# EAGLE board Circuit v1 (EAGLE 5.11)
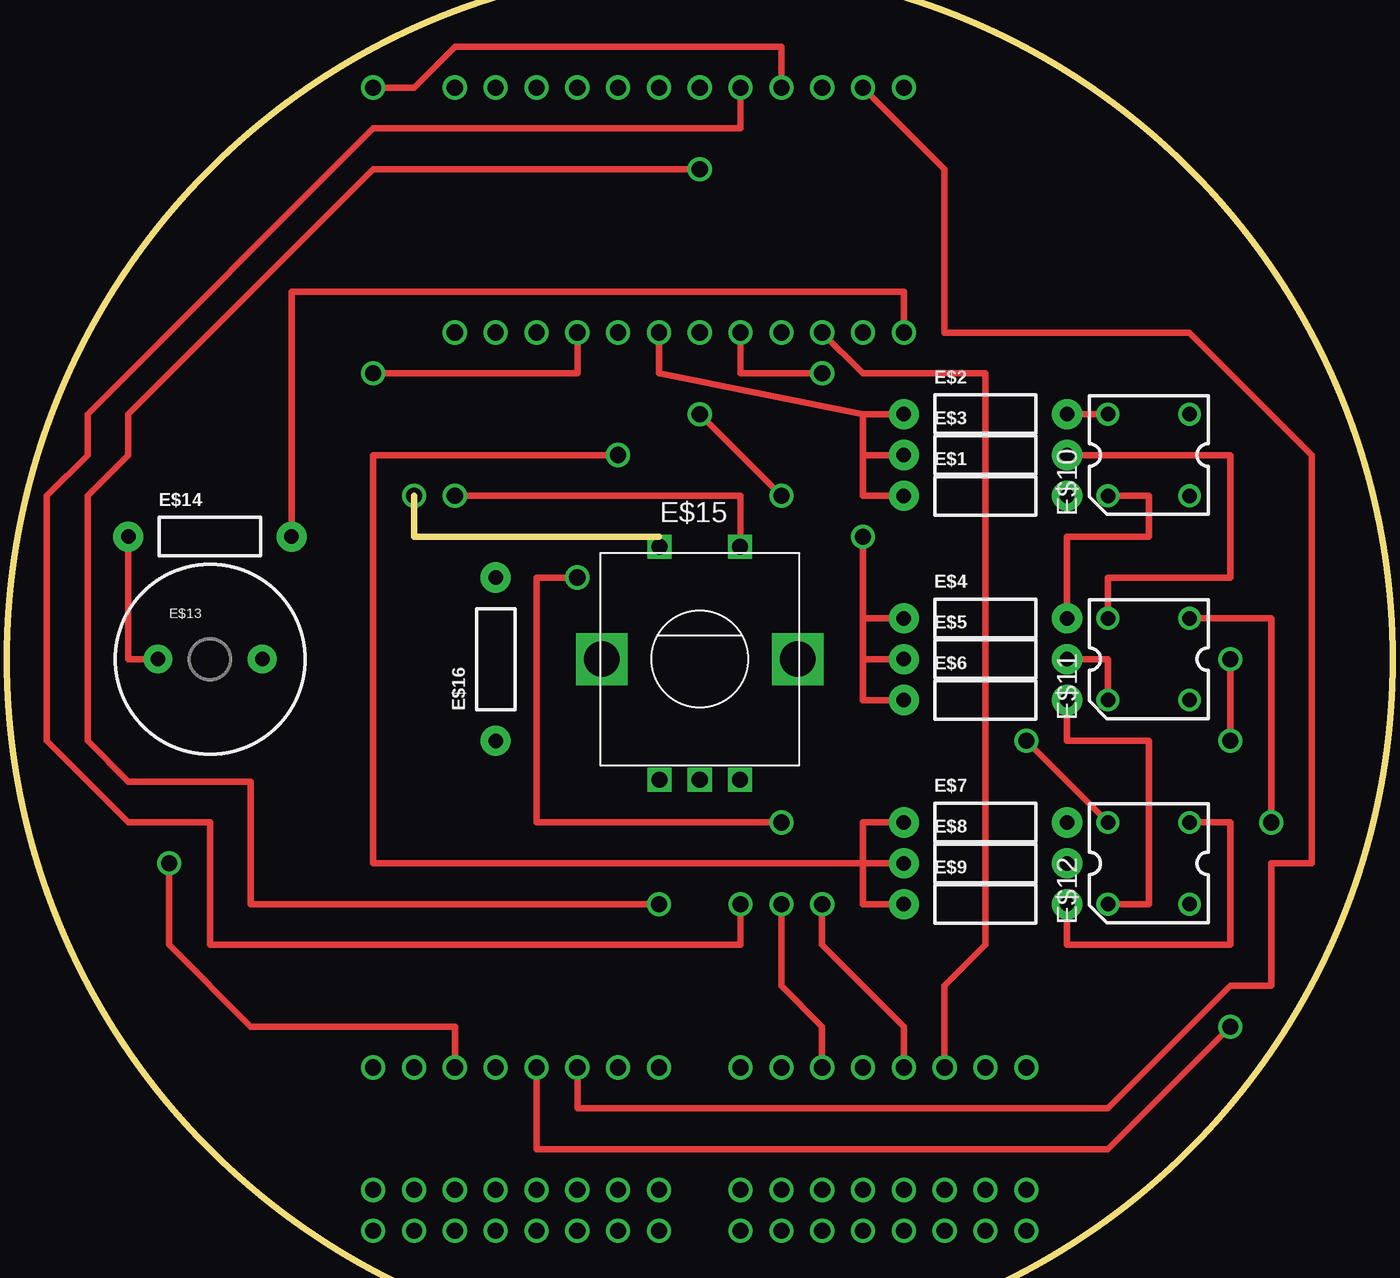
[diagram p0: board, top side]
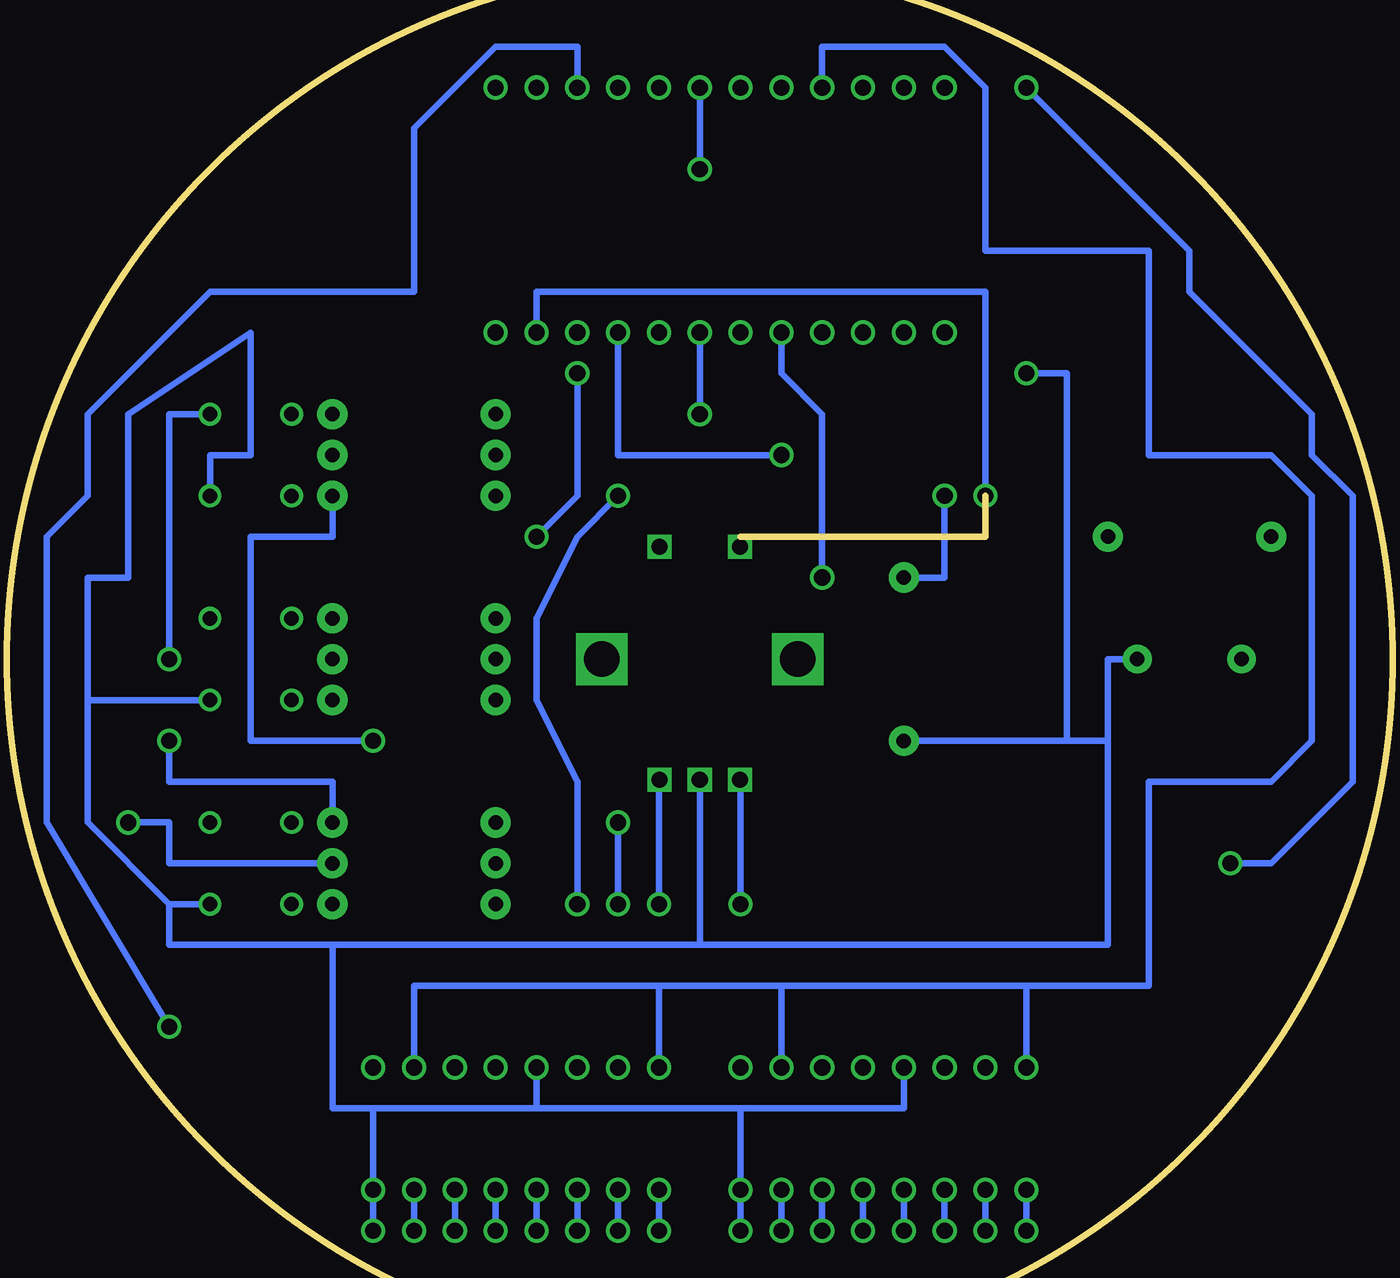
[diagram p1: board, bottom side, seen from below]

Size 15.24 x 2.54 mm. Coordinates in mm from the lower left corner, seen from the top.
Outline: 15.24,0 0,0 0,2.54
Copper layers (1*16): Top 0.035mm / dielectric 1.5mm / Bottom 0.035mm
Design rules "default": minimum track width 10mil, minimum drill 24mil, track to track 8mil, track to pad 8mil, pad to pad 8mil, via to via 8mil, smd to smd 8mil, copper to edge 40mil, drill to drill 8mil, minimum pad ring 10mil, minimum via ring 8mil, stop-mask expansion 4mil, vias tented up to drill 0mil, thermal gap 10mil
Milling: area -25.3,-50.7 to 60.9,35.5

## Footprints (pad centres in the part's own frame; a part is rotated, then mirrored left to right if it is on the bottom)
AXIAL-0.4 = drill 0.9 pad 1.88 round: P$1 -5.08,0; P$2 5.08,0
SUPERFLUX-7.6X7.6 = drill 0.9 pad 1.422 round: 1 -2.54,2.54; 2 2.54,2.54; 3 -2.54,-2.54; 4 2.54,-2.54
BUZZER-12MM = drill 0.9 pad 1.778 round: + 3.25,0; - -3.25,0
ALPS_EC12E_SW = drill 1 square: A -2.5,-7.5; B 2.5,-7.5; C 0,-7.5; D -2.5,7; E 2.5,7 | drill 2.2 square: GND1 -6.1,0; GND2 6.1,0

## Placement (x,y rotation side)
E$1  [AXIAL-0.4]  35.56,2.54 0 top  (outside the outline)
E$2  [AXIAL-0.4]  35.56,7.62 0 top  (outside the outline)
E$3  [AXIAL-0.4]  35.56,5.08 0 top  (outside the outline)
E$4  [AXIAL-0.4]  35.56,-5.08 0 top  (outside the outline)
E$5  [AXIAL-0.4]  35.56,-7.62 0 top  (outside the outline)
E$6  [AXIAL-0.4]  35.56,-10.16 0 top  (outside the outline)
E$7  [AXIAL-0.4]  35.56,-17.78 0 top  (outside the outline)
E$8  [AXIAL-0.4]  35.56,-20.32 0 top  (outside the outline)
E$9  [AXIAL-0.4]  35.56,-22.86 0 top  (outside the outline)
E$10  [SUPERFLUX-7.6X7.6]  45.72,5.08 0 top  (outside the outline)
E$11  [SUPERFLUX-7.6X7.6]  45.72,-7.62 0 top  (outside the outline)
E$12  [SUPERFLUX-7.6X7.6]  45.72,-20.32 0 top  (outside the outline)
E$13  [BUZZER-12MM]  -12.7,-7.62 0 top  (outside the outline)
E$14  [AXIAL-0.4]  -12.7,0 0 top  (outside the outline)
E$15  [ALPS_EC12E_SW]  17.78,-7.62 0 top
E$16  [AXIAL-0.4]  5.08,-7.62 90 top

## Library data of the parts
E$1-E$9 E$13 E$14 E$16 = SparkFun
E$10-E$12 = led
E$15 = switch-alps

## Nets
S$2: E$4.P$2 E$10.3
S$3: E$5.P$2 E$11.3
S$4: E$6.P$2 E$12.3
S$5: E$2.P$2 E$10.1
S$6: E$14.P$2
S$9: E$4.P$1 E$6.P$1
S$11: E$16.P$2
S$12: E$14.P$1
S$24: E$10.4 E$11.4 E$12.4 E$16.P$1
S$29: E$3.P$2 E$11.1
S$31: E$1.P$2 E$12.1
S$33: E$9.P$2 E$12.2
S$34: E$7.P$2 E$10.2
S$35: E$8.P$2 E$11.2
S$38: E$5.P$1
S$40: E$7.P$1 E$8.P$1 E$9.P$1
S$53: E$1.P$1 E$2.P$1 E$3.P$1

## Tracks (layer width: path | path; a pad name or v marks a point on that pad's centre or on a via)
S$1  (via drill 1)
  Bottom 0.406: v0,2.54 0,15.24 27.94,15.24 v27.94,12.7
S$2
  Top 0.406: E$10.3 45.72,2.54 45.72,0 40.64,0 E$4.P$2
S$3
  Top 0.406: E$11.3 43.18,-7.62 E$5.P$2
S$4
  Top 0.406: E$12.3 45.72,-22.86 45.72,-12.7 40.64,-12.7 E$6.P$2
S$5
  Top 0.406: E$2.P$2 E$10.1
S$6  (via drill 1)
  Top 0.406: E$14.P$2 -7.62,15.24 30.48,15.24 v30.48,12.7
S$7  (via drill 1)
  other vias: 0,-33.02
S$8  (via drill 1)
  Top 0.406: v2.54,-33.02 2.54,-30.48 -10.16,-30.48 -15.24,-25.4 v-15.24,-20.32 | v-2.54,27.94 0,27.94 2.54,30.48 22.86,30.48 v22.86,27.94
  Bottom 0.406: v-15.24,-20.32 -17.78,-20.32 -22.86,-15.24 -22.86,2.54 -20.32,5.08 -20.32,7.62 -12.7,15.24 -12.7,17.78 v-2.54,27.94
S$9  (via drill 1)
  Top 0.406: v25.4,10.16 20.32,10.16 v20.32,12.7 | 27.94,-5.08 E$4.P$1 | 27.94,-5.08 v27.94,0 | E$6.P$1 27.94,-10.16 27.94,-5.08
  Bottom 0.406: v25.4,10.16 25.4,2.54 v27.94,0
S$11  (via drill 1)
  Top 0.406: 20.32,0 20.32,2.54 v2.54,2.54
  Bottom 0.406: v2.54,2.54 2.54,-2.54 E$16.P$2
S$12
  Top 0.406: -15.24,-7.62 -17.78,-7.62 E$14.P$1
S$13  (via drill 1)
  Top 0.406: v17.78,22.86 -2.54,22.86 -17.78,7.62 -17.78,5.08 -20.32,2.54 -20.32,-12.7 -17.78,-15.24 -10.16,-15.24 -10.16,-22.86 v15.24,-22.86
  Bottom 0.406: v15.24,-22.86 15.24,-15.24 | v17.78,22.86 v17.78,27.94
S$14  (via drill 1)
  Top 0.406: v10.16,-2.54 7.62,-2.54 7.62,-17.78 v22.86,-17.78 | v22.86,-22.86 22.86,-27.94 25.4,-30.48 v25.4,-33.02
  Bottom 0.406: v12.7,12.7 12.7,10.16 10.16,7.62 v10.16,-2.54 | v22.86,-17.78 v22.86,-22.86
S$15  (via drill 1)
  Top 0.406: v20.32,-22.86 20.32,-25.4 -12.7,-25.4 -12.7,-17.78 -17.78,-17.78 -22.86,-12.7 -22.86,2.54 -20.32,5.08 -20.32,7.62 -2.54,25.4 20.32,25.4 v20.32,27.94
  Bottom 0.406: v20.32,-22.86 20.32,-15.24
S$17  (via drill 1)
  Top 0.406: v7.62,-33.02 7.62,-38.1 43.18,-38.1 v50.8,-30.48
  Bottom 0.406: v50.8,-30.48 58.42,-17.78 58.42,0 55.88,2.54 55.88,7.62 48.26,15.24 35.56,15.24 35.56,25.4 30.48,30.48 25.4,30.48 v25.4,27.94
S$18  (via drill 1)
  Top 0.406: v10.16,-33.02 10.16,-35.56 43.18,-35.56 50.8,-27.94 53.34,-27.94 53.34,-20.32 55.88,-20.32 55.88,5.08 48.26,12.7 33.02,12.7 33.02,22.86 v27.94,27.94
S$19  (via drill 1)
  Bottom 0.406: v12.7,-33.02 12.7,-27.94 | v10.16,27.94 10.16,30.48 2.54,30.48 0,27.94 0,17.78 -10.16,17.78 -10.16,5.08 -17.78,5.08 -20.32,2.54 -20.32,-12.7 -17.78,-15.24 -10.16,-15.24 -10.16,-27.94 -2.54,-27.94 | -2.54,-27.94 v-2.54,-33.02 | 12.7,-27.94 -2.54,-27.94 | 12.7,-27.94 20.32,-27.94 | 20.32,-27.94 v20.32,-33.02 | 20.32,-27.94 35.56,-27.94 v35.56,-33.02
S$20  (via drill 1)
  other vias: 15.24,-33.02
S$22  (via drill 1)
  other vias: 22.86,-33.02
S$24  (via drill 1)
  Top 0.406: v-2.54,10.16 10.16,10.16 v10.16,12.7
  Bottom 0.406: v5.08,-33.02 5.08,-35.56 15.24,-35.56 | 27.94,-35.56 15.24,-35.56 | 38.1,-35.56 27.94,-35.56 | 38.1,-35.56 40.64,-35.56 40.64,-25.4 | E$10.4 48.26,5.08 45.72,5.08 45.72,12.7 53.34,7.62 53.34,-2.54 55.88,-2.54 55.88,-10.16 | 55.88,-10.16 E$11.4 | 55.88,-10.16 55.88,-17.78 50.8,-22.86 | 50.8,-22.86 E$12.4 | 50.8,-22.86 50.8,-25.4 40.64,-25.4 | v-2.54,10.16 -5.08,10.16 -5.08,-12.7 | -5.08,-12.7 E$16.P$1 | -10.16,-7.62 -7.62,-7.62 -7.62,-12.7 | 17.78,-25.4 40.64,-25.4 | 17.78,-25.4 17.78,-15.24 | -7.62,-12.7 -5.08,-12.7 | -7.62,-12.7 -7.62,-25.4 17.78,-25.4 | 38.1,-35.56 v38.1,-40.64 v38.1,-43.18 | 15.24,-35.56 v15.24,-40.64 v15.24,-43.18 | 27.94,-35.56 v27.94,-33.02
S$25  (via drill 1)
  Top 0.406: v30.48,-33.02 30.48,-30.48 25.4,-25.4 v25.4,-22.86 | v22.86,2.54 v17.78,7.62
  Bottom 0.406: v25.4,-22.86 25.4,-15.24 27.94,-10.16 27.94,-5.08 25.4,0 v22.86,2.54 | v17.78,7.62 v17.78,12.7
S$26  (via drill 1)
  Top 0.406: v33.02,-33.02 33.02,-27.94 35.56,-25.4 35.56,10.16 27.94,10.16 v25.4,12.7
S$28  (via drill 1)
  other vias: 38.1,-33.02
S$29
  Top 0.406: E$11.1 43.18,-2.54 50.8,-2.54 50.8,5.08 E$3.P$2
S$31  (via drill 1)
  Top 0.406: E$12.1 v38.1,-12.7
  Bottom 0.406: v38.1,-12.7 45.72,-12.7 45.72,0 40.64,0 E$1.P$2
S$33
  Top 0.406: E$12.2 50.8,-17.78 50.8,-25.4 40.64,-25.4 E$9.P$2
S$34  (via drill 1)
  Top 0.406: v50.8,-12.7 v50.8,-7.62
  Bottom 0.406: E$10.2 50.8,7.62 v50.8,-7.62 | v50.8,-12.7 50.8,-15.24 40.64,-15.24 E$7.P$2
S$35  (via drill 1)
  Top 0.406: E$11.2 53.34,-5.08 v53.34,-17.78
  Bottom 0.406: v53.34,-17.78 50.8,-17.78 50.8,-20.32 E$8.P$2
S$38
  Top 0.406: 27.94,-7.62 E$5.P$1
S$40  (via drill 1)
  Top 0.406: E$9.P$1 27.94,-22.86 27.94,-20.32 | E$7.P$1 27.94,-17.78 27.94,-20.32 | v12.7,5.08 -2.54,5.08 -2.54,-20.32 27.94,-20.32 | 27.94,-20.32 E$8.P$1
  Bottom 0.406: v12.7,5.08 22.86,5.08 v22.86,12.7
S$41  (via drill 1)
  other vias: 30.48,27.94
S$42  (via drill 1)
  other vias: 15.24,27.94
S$43  (via drill 1)
  other vias: 12.7,27.94
S$45  (via drill 1)
  other vias: 7.62,27.94
S$46  (via drill 1)
  other vias: 5.08,27.94
S$47  (via drill 1)
  other vias: 2.54,27.94
S$48  (via drill 1)
  other vias: 2.54,12.7
S$49  (via drill 1)
  other vias: 5.08,12.7
S$50  (via drill 1)
  other vias: 7.62,12.7
S$51  (via drill 1)
  Bottom 0.406: v33.02,-40.64 v33.02,-43.18
S$53  (via drill 1)
  Top 0.406: E$1.P$1 27.94,2.54 27.94,5.08 | 27.94,5.08 E$3.P$1 | 27.94,7.62 E$2.P$1 | 27.94,7.62 27.94,5.08 | 27.94,7.62 15.24,10.16 v15.24,12.7
S$55  (via drill 1)
  Bottom 0.406: v35.56,-40.64 v35.56,-43.18
S$56  (via drill 1)
  Bottom 0.406: v30.48,-40.64 v30.48,-43.18
S$58  (via drill 1)
  Bottom 0.406: v27.94,-40.64 v27.94,-43.18
S$59  (via drill 1)
  Bottom 0.406: v25.4,-40.64 v25.4,-43.18
S$60  (via drill 1)
  Bottom 0.406: v22.86,-40.64 v22.86,-43.18
S$63  (via drill 1)
  Bottom 0.406: v12.7,-40.64 v12.7,-43.18
S$64  (via drill 1)
  Bottom 0.406: v7.62,-40.64 v7.62,-43.18
S$65  (via drill 1)
  Bottom 0.406: v10.16,-40.64 v10.16,-43.18
S$66  (via drill 1)
  Bottom 0.406: v5.08,-40.64 v5.08,-43.18
S$67  (via drill 1)
  Bottom 0.406: v2.54,-40.64 v2.54,-43.18
S$68  (via drill 1)
  Bottom 0.406: v0,-40.64 v0,-43.18
S$69  (via drill 1)
  Bottom 0.406: v-2.54,-40.64 v-2.54,-43.18
S$72  (via drill 1)
  Bottom 0.406: v20.32,-40.64 v20.32,-43.18